# Altium PCB heart.PcbDoc (part 7 of 8)
Units mil, origin at the board's own origin, x right, y up, seen from the top; angles counter-clockwise.
Board outline 5000 x 6000 mil, 2 copper layers (Top Layer, Bottom Layer); 76 components, 43 nets, 328 pads, 50 vias.
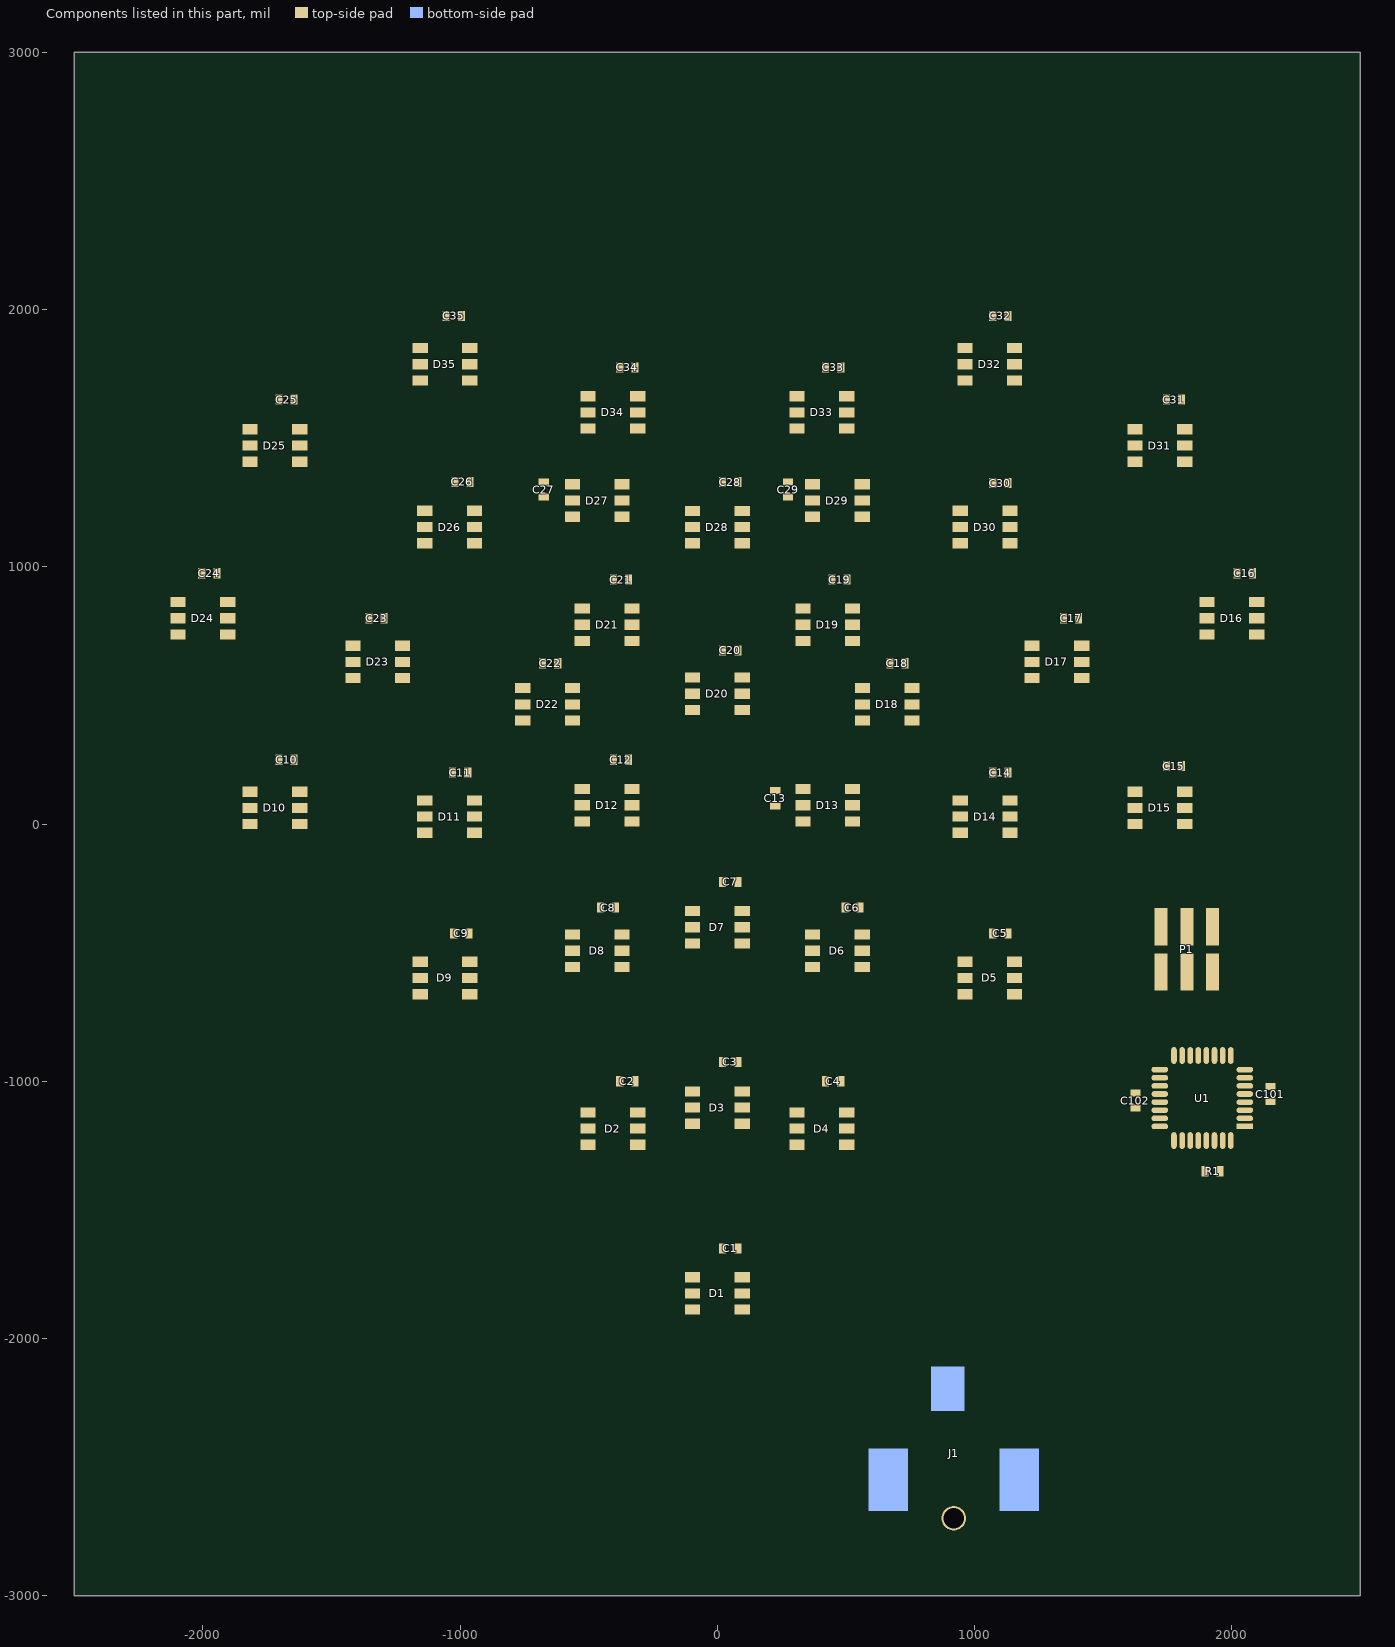
[diagram p7: the components of this part, seen from the top]

## Via types
v1: diameter 48, hole 20, Top Layer to Bottom Layer, 46 vias
v2: diameter 165, hole 150, Top Layer to Bottom Layer, 4 vias

## Nets (pads, with @x,y where several pads share a name; then routed paths per layer and width w, separated by ;. In a path a pad name is that pad's centre, name@x,y a point inside that pad or via, vN(x,y) a via of type N, cw(c..) or ccw(c..) an arc to the next point about the centre after c; other vN are vias at no path point) (continued)
copper on no net: (continued)
  Bottom Layer w2.65: -790.97,-2197.42 -777.7,-2197.42 ; -790.97,-1987.67 -785.66,-1987.67 ; -790.97,-1985.02 -775.04,-1985.02 ; -790.97,-1982.36 -764.42,-1982.36 ; -790.97,-1979.71 -745.84,-1979.71 ; -790.97,-1573.49 -753.8,-1573.49 ; -790.97,-1517.73 -753.8,-1517.73 ; -790.97,-1432.77 -756.46,-1432.77 ; -790.97,-1326.57 -764.42,-1326.57 ; -788.32,-2231.94 -772.39,-2231.94 ; -788.32,-2229.28 -772.39,-2229.28 ; -788.32,-2226.63 -775.04,-2226.63 ; -788.32,-2223.97 -775.04,-2223.97 ; -788.32,-2194.77 -775.04,-2194.77 ; -788.32,-2192.11 -775.04,-2192.11 ; -788.32,-2189.46 -775.04,-2189.46 ; -788.32,-2186.8 -772.39,-2186.8 ; -788.32,-1515.08 -745.84,-1515.08 ; -788.32,-1430.12 -756.46,-1430.12 ; -788.32,-1323.92 -759.11,-1323.92 ; -785.66,-2237.25 -769.73,-2237.25 ; -785.66,-2234.59 -769.73,-2234.59 ; -785.66,-2184.15 -772.39,-2184.15 ; -785.66,-2181.49 -769.73,-2181.49 ; -785.66,-1576.14 -751.15,-1576.14 ; -785.66,-1512.42 -679.46,-1512.42 ; -785.66,-1427.46 -756.46,-1427.46 ; -783.01,-2239.9 -767.08,-2239.9 ; -783.01,-2178.84 -769.73,-2178.84 ; -783.01,-2176.18 -767.08,-2176.18 ; -783.01,-1424.81 -756.46,-1424.81 ; -783.01,-1321.26 -753.8,-1321.26 ; -780.35,-2277.07 -775.04,-2277.07 ; -780.35,-2245.21 -761.77,-2245.21 ; -780.35,-2242.56 -764.42,-2242.56 ; -780.35,-2173.53 -764.42,-2173.53 ; -780.35,-2170.87 -761.77,-2170.87 ; -780.35,-2040.77 -753.8,-2040.77 ; -780.35,-2038.12 -756.46,-2038.12 ; -780.35,-2035.46 -759.11,-2035.46 ; -780.35,-2032.81 -759.11,-2032.81 ; -780.35,-2030.15 -759.11,-2030.15 ; -780.35,-2027.5 -759.11,-2027.5 ; -780.35,-2024.84 -759.11,-2024.84 ; -780.35,-2022.19 -759.11,-2022.19 ; -780.35,-1578.8 -759.11,-1578.8 ; -780.35,-1509.77 -676.81,-1509.77 ; -780.35,-1422.15 -756.46,-1422.15 ; -777.7,-2274.42 -769.73,-2274.42 ; -777.7,-2271.76 -767.08,-2271.76 ; -777.7,-2269.11 -764.42,-2269.11 ; -777.7,-2247.87 -759.11,-2247.87 ; -777.7,-2168.22 -759.11,-2168.22 ; -777.7,-2046.08 -751.15,-2046.08 ; -777.7,-2043.43 -753.8,-2043.43 ; -777.7,-2019.53 -759.11,-2019.53 ; -777.7,-2016.88 -759.11,-2016.88 ; -777.7,-1507.11 -674.15,-1507.11 ; -777.7,-1318.61 -748.49,-1318.61 ; -775.04,-2287.69 -307.76,-2287.69 ; -775.04,-2266.45 -764.42,-2266.45 ; -775.04,-2263.8 -703.36,-2263.8 ; -775.04,-2261.14 -729.91,-2261.14 ; -775.04,-2258.49 -743.18,-2258.49 ; -775.04,-2253.18 -753.8,-2253.18 ; -775.04,-2250.52 -756.46,-2250.52 ; -775.04,-2165.56 -756.46,-2165.56 ; -775.04,-2048.74 -745.84,-2048.74 ; -775.04,-2014.22 -759.11,-2014.22 ; -775.04,-1902.71 -716.63,-1902.71 ; -775.04,-1788.55 -557.33,-1788.55 ; -775.04,-1504.46 -719.29,-1504.46 ; -775.04,-1419.5 -756.46,-1419.5 ; -772.39,-2255.83 -748.49,-2255.83 ; -772.39,-2162.91 -753.8,-2162.91 ; -772.39,-2051.39 -743.18,-2051.39 ; -772.39,-1501.8 -729.91,-1501.8 ; -772.39,-1315.95 -743.18,-1315.95 ; -769.73,-2285.04 -307.76,-2285.04 ; -769.73,-2160.25 -751.15,-2160.25 ; -769.73,-2157.6 -745.84,-2157.6 ; -769.73,-2054.05 -735.22,-2054.05 ; -769.73,-2011.57 -759.11,-2011.57 ; -767.08,-2282.38 -307.76,-2282.38 ; -767.08,-1499.15 -735.22,-1499.15 ; -767.08,-1313.3 -737.87,-1313.3 ; -764.42,-2154.94 -737.87,-2154.94 ; -764.42,-2056.7 -737.87,-2056.7 ; -764.42,-2008.91 -756.46,-2008.91 ; -764.42,-1496.49 -740.53,-1496.49 ; -761.77,-2279.73 -740.53,-2279.73 ; -761.77,-2231.94 -626.36,-2231.94 ; -761.77,-2152.28 -713.98,-2152.28 ; -761.77,-1493.84 -743.18,-1493.84 ; -761.77,-1310.64 -729.91,-1310.64 ; -759.11,-2277.07 -751.15,-2277.07 ; -759.11,-2234.59 -525.47,-2234.59 ; -759.11,-1791.2 -554.67,-1791.2 ; -759.11,-1491.18 -745.84,-1491.18 ; -759.11,-1297.37 -740.53,-1297.37 ; -759.11,-1294.71 -743.18,-1294.71 ; -759.11,-1292.06 -745.84,-1292.06 ; -759.11,-1289.4 -748.49,-1289.4 ; -759.11,-1286.75 -748.49,-1286.75 ; -759.11,-1284.09 -751.15,-1284.09 ; -759.11,-1281.44 -751.15,-1281.44 ; -759.11,-1278.78 -753.8,-1278.78 ; -756.46,-2237.25 -522.81,-2237.25 ; -756.46,-2149.63 -668.84,-2149.63 ; -756.46,-2059.36 -745.84,-2059.36 ; -756.46,-1730.14 -745.84,-1730.14 ; -756.46,-1727.48 -745.84,-1727.48 ; -756.46,-1724.83 -745.84,-1724.83 ; -756.46,-1722.17 -745.84,-1722.17 ; -756.46,-1719.52 -745.84,-1719.52 ; -756.46,-1716.86 -743.18,-1716.86 ; -756.46,-1714.21 -743.18,-1714.21 ; -756.46,-1711.55 -743.18,-1711.55 ; -756.46,-1488.53 -748.49,-1488.53 ; -756.46,-1307.99 -719.29,-1307.99 ; -756.46,-1305.33 -666.19,-1305.33 ; -756.46,-1302.68 -671.5,-1302.68 ; -756.46,-1300.02 -676.81,-1300.02 ; -756.46,-1276.13 -753.8,-1276.13 ; -756.46,-1273.47 -753.8,-1273.47 ; -753.8,-2266.45 -708.67,-2266.45 ; -753.8,-2239.9 -520.16,-2239.9 ; -753.8,-2146.97 -671.5,-2146.97 ; -753.8,-1735.45 -745.84,-1735.45 ; -753.8,-1732.79 -745.84,-1732.79 ; -753.8,-1708.9 -740.53,-1708.9 ; -753.8,-1706.24 -740.53,-1706.24 ; -753.8,-1703.59 -737.87,-1703.59 ; -753.8,-1589.42 -719.29,-1589.42 ; -753.8,-1485.87 -751.15,-1485.87 ; -753.8,-1270.82 -751.15,-1270.82 ; -751.15,-2242.56 -517.5,-2242.56 ; -751.15,-1740.76 -743.18,-1740.76 ; -751.15,-1738.1 -743.18,-1738.1 ; -751.15,-1700.93 -735.22,-1700.93 ; -751.15,-1698.28 -735.22,-1698.28 ; -748.49,-2245.21 -692.74,-2245.21 ; -748.49,-2144.32 -668.84,-2144.32 ; -748.49,-1793.86 -554.67,-1793.86 ; -748.49,-1743.41 -743.18,-1743.41 ; -748.49,-1695.62 -732.56,-1695.62 ; -748.49,-1586.76 -719.29,-1586.76 ; -745.84,-2269.11 -713.98,-2269.11 ; -745.84,-2075.29 -618.4,-2075.29 ; -745.84,-1746.07 -740.53,-1746.07 ; -745.84,-1692.97 -727.25,-1692.97 ; -743.18,-2247.87 -698.05,-2247.87 ; -743.18,-1748.72 -737.87,-1748.72 ; -743.18,-1690.31 -724.6,-1690.31 ; -743.18,-1472.6 -496.26,-1472.6 ; -743.18,-1469.94 -496.26,-1469.94 ; -743.18,-1467.29 -496.26,-1467.29 ; -743.18,-1281.44 -716.63,-1281.44 ; -743.18,-1278.78 -711.32,-1278.78 ; -743.18,-1276.13 -703.36,-1276.13 ; -743.18,-1273.47 -698.05,-1273.47 ; -740.53,-2141.66 -668.84,-2141.66 ; -740.53,-1796.51 -552.02,-1796.51 ; -740.53,-1751.38 -737.87,-1751.38 ; -740.53,-1687.66 -719.29,-1687.66 ; -740.53,-1584.11 -716.63,-1584.11 ; -740.53,-1477.91 -671.5,-1477.91 ; -740.53,-1475.25 -666.19,-1475.25 ; -740.53,-1464.63 -496.26,-1464.63 ; -740.53,-1461.98 -496.26,-1461.98 ; -740.53,-1459.32 -496.26,-1459.32 ; -740.53,-1395.6 -724.6,-1395.6 ; -740.53,-1392.95 -727.25,-1392.95 ; -740.53,-1390.29 -727.25,-1390.29 ; -740.53,-1387.64 -729.91,-1387.64 ; -740.53,-1384.98 -729.91,-1384.98 ; -740.53,-1382.33 -729.91,-1382.33 ; -740.53,-1379.67 -729.91,-1379.67 ; -740.53,-1377.02 -727.25,-1377.02 ; -740.53,-1374.36 -727.25,-1374.36 ; -740.53,-1270.82 -690.08,-1270.82 ; -737.87,-2072.63 -615.74,-2072.63 ; -737.87,-1581.45 -716.63,-1581.45 ; -737.87,-1480.56 -676.81,-1480.56 ; -737.87,-1456.67 -496.26,-1456.67 ; -737.87,-1454.01 -565.3,-1454.01 ; -737.87,-1451.36 -570.61,-1451.36 ; -737.87,-1400.91 -721.94,-1400.91 ; -737.87,-1398.26 -724.6,-1398.26 ; -737.87,-1371.71 -724.6,-1371.71 ; -737.87,-1369.05 -724.6,-1369.05 ; -737.87,-1284.09 -724.6,-1284.09 ; -735.22,-2250.52 -708.67,-2250.52 ; -735.22,-1685 -708.67,-1685 ; -735.22,-1578.8 -713.98,-1578.8 ; -735.22,-1483.22 -682.12,-1483.22 ; -735.22,-1448.7 -573.26,-1448.7 ; -735.22,-1446.05 -575.91,-1446.05 ; -735.22,-1443.39 -578.57,-1443.39 ; -735.22,-1440.74 -581.23,-1440.74 ; -735.22,-1438.08 -581.23,-1438.08 ; -735.22,-1435.43 -583.88,-1435.43 ; -735.22,-1432.77 -583.88,-1432.77 ; -735.22,-1419.5 -732.56,-1419.5 ; -735.22,-1406.22 -711.32,-1406.22 ; -735.22,-1403.57 -716.63,-1403.57 ; -735.22,-1366.4 -719.29,-1366.4 ; -735.22,-1268.16 -682.12,-1268.16 ; -732.56,-2069.98 -613.09,-2069.98 ; -732.56,-1799.17 -549.36,-1799.17 ; -732.56,-1515.08 -682.12,-1515.08 ; -732.56,-1485.87 -687.43,-1485.87 ; -732.56,-1430.12 -708.67,-1430.12 ; -732.56,-1427.46 -719.29,-1427.46 ; -732.56,-1424.81 -724.6,-1424.81 ; -732.56,-1422.15 -729.91,-1422.15 ; -732.56,-1363.74 -716.63,-1363.74 ; -732.56,-1297.37 -682.12,-1297.37 ; -732.56,-1260.2 -660.88,-1260.2 ; -732.56,-1257.54 -655.57,-1257.54 ; -729.91,-2157.6 -713.98,-2157.6 ; -729.91,-2154.94 -713.98,-2154.94 ; -729.91,-2139.01 -698.05,-2139.01 ; -729.91,-1682.35 -602.47,-1682.35 ; -729.91,-1576.14 -711.32,-1576.14 ; -729.91,-1408.88 -660.88,-1408.88 ; -729.91,-1265.51 -676.81,-1265.51 ; -729.91,-1262.85 -668.84,-1262.85 ; -727.25,-2162.91 -713.98,-2162.91 ; -727.25,-2160.25 -713.98,-2160.25 ; -727.25,-2067.32 -607.78,-2067.32 ; -727.25,-1801.82 -546.71,-1801.82 ; -727.25,-1488.53 -690.08,-1488.53 ; -727.25,-1411.53 -666.19,-1411.53 ; -727.25,-1361.09 -695.39,-1361.09 ; -724.6,-2181.49 -721.94,-2181.49 ; -724.6,-2168.22 -716.63,-2168.22 ; -724.6,-2165.56 -713.98,-2165.56 ; -724.6,-2064.67 -605.12,-2064.67 ; -724.6,-1934.57 -639.64,-1934.57 ; -724.6,-1679.69 -610.43,-1679.69 ; -724.6,-1573.49 -711.32,-1573.49 ; -724.6,-1517.73 -682.12,-1517.73 ; -724.6,-1414.19 -668.84,-1414.19 ; -724.6,-1358.43 -700.7,-1358.43 ; -721.94,-2178.84 -719.29,-2178.84 ; -721.94,-2176.18 -719.29,-2176.18 ; -721.94,-2173.53 -716.63,-2173.53 ; -721.94,-2170.87 -716.63,-2170.87 ; -721.94,-2062.01 -597.16,-2062.01 ; -721.94,-1804.48 -544.05,-1804.48 ; -721.94,-1677.04 -613.09,-1677.04 ; -721.94,-1570.83 -708.67,-1570.83 ; -721.94,-1520.39 -682.12,-1520.39 ; -721.94,-1416.84 -674.15,-1416.84 ; -721.94,-1294.71 -684.77,-1294.71 ; -719.29,-2279.73 -307.76,-2279.73 ; -719.29,-2059.36 -586.54,-2059.36 ; -719.29,-1491.18 -698.05,-1491.18 ; -719.29,-1390.29 -674.15,-1390.29 ; -719.29,-1387.64 -671.5,-1387.64 ; -716.63,-2056.7 -496.26,-2056.7 ; -716.63,-2054.05 -496.26,-2054.05 ; -716.63,-1568.18 -706.01,-1568.18 ; -716.63,-1525.7 -682.12,-1525.7 ; -716.63,-1523.04 -682.12,-1523.04 ; -716.63,-1392.95 -676.81,-1392.95 ; -716.63,-1355.78 -708.67,-1355.78 ; -716.63,-1292.06 -684.77,-1292.06 ; -713.98,-2261.14 -698.05,-2261.14 ; -713.98,-2051.39 -496.26,-2051.39 ; -713.98,-1807.13 -538.74,-1807.13 ; -713.98,-1674.38 -618.4,-1674.38 ; -713.98,-1565.52 -700.7,-1565.52 ; -713.98,-1562.87 -698.05,-1562.87 ; -713.98,-1528.35 -679.46,-1528.35 ; -713.98,-1419.5 -682.12,-1419.5 ; -713.98,-1395.6 -682.12,-1395.6 ; -711.32,-2048.74 -496.26,-2048.74 ; -711.32,-1560.21 -692.74,-1560.21 ; -711.32,-1557.56 -684.77,-1557.56 ; -711.32,-1533.66 -676.81,-1533.66 ; -711.32,-1531.01 -679.46,-1531.01 ; -711.32,-1289.4 -676.81,-1289.4 ; -708.67,-2277.07 -517.5,-2277.07 ; -708.67,-2046.08 -496.26,-2046.08 ; -708.67,-1809.79 -536.09,-1809.79 ; -708.67,-1775.27 -562.64,-1775.27 ; -708.67,-1554.9 -639.64,-1554.9 ; -708.67,-1552.25 -639.64,-1552.25 ; -708.67,-1549.59 -636.98,-1549.59 ; -708.67,-1546.94 -636.98,-1546.94 ; -708.67,-1544.28 -634.33,-1544.28 ; -708.67,-1541.63 -634.33,-1541.63 ; -708.67,-1538.97 -668.84,-1538.97 ; -708.67,-1536.32 -674.15,-1536.32 ; -706.01,-2043.43 -496.26,-2043.43 ; -706.01,-2003.6 -695.39,-2003.6 ; -706.01,-1979.71 -586.54,-1979.71 ; -706.01,-1671.73 -621.05,-1671.73 ; -706.01,-1504.46 -671.5,-1504.46 ; -706.01,-1398.26 -690.08,-1398.26 ; -706.01,-1286.75 -668.84,-1286.75 ; -703.36,-2274.42 -520.16,-2274.42 ; -703.36,-2040.77 -496.26,-2040.77 ; -703.36,-2006.26 -671.5,-2006.26 ; -703.36,-1931.92 -639.64,-1931.92 ; -703.36,-1812.44 -528.12,-1812.44 ; -703.36,-1626.59 -682.12,-1626.59 ; -703.36,-1623.93 -687.43,-1623.93 ; -703.36,-1621.28 -690.08,-1621.28 ; -703.36,-1618.62 -692.74,-1618.62 ; -703.36,-1615.97 -695.39,-1615.97 ; -703.36,-1613.31 -695.39,-1613.31 ; -703.36,-1610.66 -698.05,-1610.66 ; -703.36,-1608 -698.05,-1608 ; -703.36,-1605.35 -698.05,-1605.35 ; -703.36,-1602.69 -698.05,-1602.69 ; -700.7,-2258.49 -695.39,-2258.49 ; -700.7,-2152.28 -663.53,-2152.28 ; -700.7,-2038.12 -496.26,-2038.12 ; -700.7,-2035.46 -496.26,-2035.46 ; -700.7,-2032.81 -496.26,-2032.81 ; -700.7,-2014.22 -496.26,-2014.22 ; -700.7,-2011.57 -496.26,-2011.57 ; -700.7,-2008.91 -496.26,-2008.91 ; -700.7,-1815.1 -496.26,-1815.1 ; -700.7,-1772.62 -565.3,-1772.62 ; -700.7,-1669.07 -621.05,-1669.07 ; -700.7,-1637.21 -690.08,-1637.21 ; -700.7,-1634.55 -684.77,-1634.55 ; -700.7,-1631.9 -679.46,-1631.9 ; -700.7,-1629.24 -674.15,-1629.24 ; -700.7,-1600.04 -698.05,-1600.04 ; -700.7,-1597.38 -695.39,-1597.38 ; -700.7,-1594.73 -695.39,-1594.73 ; -700.7,-1284.09 -660.88,-1284.09 ; -698.05,-2271.76 -520.16,-2271.76 ; -698.05,-2030.15 -496.26,-2030.15 ; -698.05,-2027.5 -496.26,-2027.5 ; -698.05,-2024.84 -496.26,-2024.84 ; -698.05,-2022.19 -496.26,-2022.19 ; -698.05,-2019.53 -496.26,-2019.53 ; -698.05,-2016.88 -496.26,-2016.88 ; -698.05,-1685 -509.54,-1685 ; -698.05,-1592.07 -692.74,-1592.07 ; -698.05,-1589.42 -690.08,-1589.42 ; -695.39,-1817.75 -496.26,-1817.75 ; -695.39,-1769.96 -565.3,-1769.96 ; -695.39,-1586.76 -684.77,-1586.76 ; -695.39,-1584.11 -658.22,-1584.11 ; -692.74,-2269.11 -520.16,-2269.11 ; -692.74,-1929.26 -639.64,-1929.26 ; -692.74,-1666.42 -623.71,-1666.42 ; -692.74,-1581.45 -660.88,-1581.45 ; -692.74,-1501.8 -636.98,-1501.8 ; -692.74,-1307.99 -663.53,-1307.99 ; -692.74,-1281.44 -655.57,-1281.44 ; -690.08,-2266.45 -514.85,-2266.45 ; -690.08,-2154.94 -658.22,-2154.94 ; -690.08,-1820.41 -496.26,-1820.41 ; -690.08,-1767.31 -565.3,-1767.31 ; -690.08,-1578.8 -663.53,-1578.8 ; -687.43,-2263.8 -506.88,-2263.8 ; -687.43,-1823.06 -496.26,-1823.06 ; -687.43,-1687.66 -517.5,-1687.66 ; -687.43,-1499.15 -639.64,-1499.15 ; -687.43,-1430.12 -583.88,-1430.12 ; -684.77,-2261.14 -504.23,-2261.14 ; -684.77,-2139.01 -668.84,-2139.01 ; -684.77,-1926.61 -639.64,-1926.61 ; -684.77,-1764.65 -565.3,-1764.65 ; -684.77,-1663.76 -626.36,-1663.76 ; -684.77,-1576.14 -666.19,-1576.14 ; -684.77,-1406.22 -658.22,-1406.22 ; -684.77,-1310.64 -660.88,-1310.64 ; -684.77,-1278.78 -647.6,-1278.78 ; -682.12,-2258.49 -504.23,-2258.49 ; -682.12,-2255.83 -506.88,-2255.83 ; -682.12,-2157.6 -652.91,-2157.6 ; -682.12,-2107.15 -629.02,-2107.15 ; -682.12,-1982.36 -591.85,-1982.36 ; -682.12,-1825.72 -496.26,-1825.72 ; -682.12,-1762 -565.3,-1762 ; -682.12,-1690.31 -525.47,-1690.31 ; -682.12,-1496.49 -639.64,-1496.49 ; -679.46,-2253.18 -506.88,-2253.18 ; -679.46,-2250.52 -509.54,-2250.52 ; -679.46,-2247.87 -512.19,-2247.87 ; -679.46,-2245.21 -514.85,-2245.21 ; -679.46,-2136.35 -666.19,-2136.35 ; -679.46,-1923.95 -636.98,-1923.95 ; -679.46,-1828.37 -496.26,-1828.37 ; -679.46,-1692.97 -530.78,-1692.97 ; -679.46,-1661.11 -629.02,-1661.11 ; -679.46,-1493.84 -639.64,-1493.84 ; -679.46,-1403.57 -655.57,-1403.57 ; -679.46,-1313.3 -658.22,-1313.3 ; -679.46,-1276.13 -639.64,-1276.13 ; -676.81,-2160.25 -647.6,-2160.25 ; -676.81,-2133.7 -666.19,-2133.7 ; -676.81,-1759.34 -565.3,-1759.34 ; -676.81,-1427.46 -583.88,-1427.46 ; -674.15,-2131.04 -666.19,-2131.04 ; -674.15,-1921.3 -636.98,-1921.3 ; -674.15,-1831.03 -496.26,-1831.03 ; -674.15,-1756.69 -567.95,-1756.69 ; -674.15,-1695.62 -581.23,-1695.62 ; -674.15,-1658.45 -629.02,-1658.45 ; -674.15,-1491.18 -642.29,-1491.18 ; -674.15,-1400.91 -652.91,-1400.91 ; -674.15,-1315.95 -655.57,-1315.95 ; -671.5,-2162.91 -642.29,-2162.91 ; -671.5,-2128.39 -666.19,-2128.39 ; -671.5,-2125.73 -668.84,-2125.73 ; -671.5,-2123.08 -668.84,-2123.08 ; -671.5,-2109.8 -629.02,-2109.8 ; -671.5,-1833.68 -496.26,-1833.68 ; -671.5,-1754.03 -567.95,-1754.03 ; -671.5,-1700.93 -583.88,-1700.93 ; -671.5,-1698.28 -581.23,-1698.28 ; -671.5,-1557.56 -642.29,-1557.56 ; -671.5,-1488.53 -644.95,-1488.53 ; -671.5,-1424.81 -583.88,-1424.81 ; -671.5,-1318.61 -652.91,-1318.61 ; -671.5,-1273.47 -631.67,-1273.47 ; -668.84,-1918.64 -636.98,-1918.64 ; -668.84,-1836.34 -496.26,-1836.34 ; -668.84,-1751.38 -565.3,-1751.38 ; -668.84,-1748.72 -565.3,-1748.72 ; -668.84,-1703.59 -583.88,-1703.59 ; -668.84,-1655.8 -631.67,-1655.8 ; -668.84,-1586.76 -655.57,-1586.76 ; -668.84,-1398.26 -650.26,-1398.26 ; -668.84,-1321.26 -650.26,-1321.26 ; -666.19,-2165.56 -636.98,-2165.56 ; -666.19,-2112.46 -629.02,-2112.46 ; -666.19,-1985.02 -599.81,-1985.02 ; -666.19,-1915.99 -634.33,-1915.99 ; -666.19,-1838.99 -496.26,-1838.99 ; -666.19,-1746.07 -565.3,-1746.07 ; -666.19,-1708.9 -583.88,-1708.9 ; -666.19,-1706.24 -583.88,-1706.24 ; -666.19,-1589.42 -655.57,-1589.42 ; -666.19,-1485.87 -647.6,-1485.87 ; -666.19,-1422.15 -583.88,-1422.15 ; -666.19,-1395.6 -623.71,-1395.6 ; -666.19,-1323.92 -647.6,-1323.92 ; -663.53,-2115.11 -626.36,-2115.11 ; -663.53,-1913.33 -631.67,-1913.33 ; -663.53,-1841.65 -496.26,-1841.65 ; -663.53,-1743.41 -565.3,-1743.41 ; -663.53,-1740.76 -570.61,-1740.76 ; -663.53,-1738.1 -575.91,-1738.1 ; -663.53,-1716.86 -586.54,-1716.86 ; -663.53,-1714.21 -586.54,-1714.21 ; -663.53,-1711.55 -586.54,-1711.55 ; -663.53,-1653.14 -634.33,-1653.14 ; -663.53,-1560.21 -642.29,-1560.21 ; -663.53,-1392.95 -618.4,-1392.95 ; -663.53,-1326.57 -647.6,-1326.57 ; -663.53,-1270.82 -623.71,-1270.82 ; -660.88,-2168.22 -634.33,-2168.22 ; -660.88,-2120.42 -626.36,-2120.42 ; -660.88,-2117.77 -626.36,-2117.77 ; -660.88,-1910.68 -631.67,-1910.68 ; -660.88,-1844.3 -496.26,-1844.3 ; -660.88,-1735.45 -578.57,-1735.45 ; -660.88,-1732.79 -581.23,-1732.79 ; -660.88,-1730.14 -583.88,-1730.14 ; -660.88,-1727.48 -583.88,-1727.48 ; -660.88,-1724.83 -586.54,-1724.83 ; -660.88,-1722.17 -586.54,-1722.17 ; -660.88,-1719.52 -586.54,-1719.52 ; -660.88,-1594.73 -655.57,-1594.73 ; -660.88,-1592.07 -655.57,-1592.07 ; -660.88,-1419.5 -583.88,-1419.5 ; -660.88,-1390.29 -615.74,-1390.29 ; -660.88,-1329.23 -644.95,-1329.23 ; -658.22,-2125.73 -623.71,-2125.73 ; -658.22,-2123.08 -623.71,-2123.08 ; -658.22,-1908.02 -629.02,-1908.02 ; -658.22,-1849.61 -496.26,-1849.61 ; -658.22,-1846.96 -496.26,-1846.96 ; -658.22,-1650.49 -634.33,-1650.49 ; -658.22,-1600.04 -655.57,-1600.04 ; -658.22,-1597.38 -655.57,-1597.38 ; -658.22,-1562.87 -642.29,-1562.87 ; -658.22,-1538.97 -631.67,-1538.97 ; -658.22,-1416.84 -583.88,-1416.84 ; -658.22,-1387.64 -615.74,-1387.64 ; -658.22,-1384.98 -631.67,-1384.98 ; -658.22,-1334.54 -642.29,-1334.54 ; -658.22,-1331.88 -644.95,-1331.88 ; -658.22,-1268.16 -615.74,-1268.16 ; -655.57,-2170.87 -629.02,-2170.87 ; -655.57,-1905.37 -626.36,-1905.37 ; -655.57,-1902.71 -623.71,-1902.71 ; -655.57,-1852.27 -496.26,-1852.27 ; -655.57,-1565.52 -644.95,-1565.52 ; -655.57,-1504.46 -636.98,-1504.46 ; -655.57,-1382.33 -636.98,-1382.33 ; -655.57,-1379.67 -639.64,-1379.67 ; -655.57,-1339.85 -642.29,-1339.85 ; -655.57,-1337.19 -642.29,-1337.19 ; -652.91,-1900.06 -618.4,-1900.06 ; -652.91,-1897.4 -615.74,-1897.4 ; -652.91,-1857.58 -496.26,-1857.58 ; -652.91,-1854.92 -496.26,-1854.92 ; -652.91,-1647.83 -636.98,-1647.83 ; -652.91,-1536.32 -631.67,-1536.32 ; -652.91,-1507.11 -639.64,-1507.11 ; -652.91,-1414.19 -581.23,-1414.19 ; -652.91,-1377.02 -639.64,-1377.02 ; -652.91,-1374.36 -639.64,-1374.36 ; -652.91,-1371.71 -639.64,-1371.71 ; -652.91,-1369.05 -636.98,-1369.05 ; -652.91,-1350.47 -639.64,-1350.47 ; -652.91,-1347.81 -639.64,-1347.81 ; -652.91,-1345.16 -639.64,-1345.16 ; -652.91,-1342.5 -639.64,-1342.5 ; -650.26,-2173.53 -621.05,-2173.53 ; -650.26,-1894.75 -607.78,-1894.75 ; -650.26,-1892.09 -599.81,-1892.09 ; -650.26,-1889.44 -496.26,-1889.44 ; -650.26,-1886.78 -496.26,-1886.78 ; -650.26,-1868.2 -496.26,-1868.2 ; -650.26,-1865.54 -496.26,-1865.54 ; -650.26,-1862.89 -496.26,-1862.89 ; -650.26,-1860.23 -496.26,-1860.23 ; -650.26,-1645.18 -636.98,-1645.18 ; -650.26,-1570.83 -644.95,-1570.83 ; -650.26,-1568.18 -644.95,-1568.18 ; -650.26,-1533.66 -629.02,-1533.66 ; -650.26,-1509.77 -639.64,-1509.77 ; -650.26,-1475.25 -496.26,-1475.25 ; -650.26,-1411.53 -581.23,-1411.53 ; -650.26,-1366.4 -636.98,-1366.4 ; -650.26,-1363.74 -636.98,-1363.74 ; -650.26,-1361.09 -636.98,-1361.09 ; -650.26,-1358.43 -636.98,-1358.43 ; -650.26,-1355.78 -636.98,-1355.78 ; -650.26,-1353.12 -636.98,-1353.12 ; -650.26,-1265.51 -607.78,-1265.51 ; -647.6,-2176.18 -615.74,-2176.18 ; -647.6,-1884.13 -496.26,-1884.13 ; -647.6,-1881.47 -496.26,-1881.47 ; -647.6,-1878.82 -496.26,-1878.82 ; -647.6,-1876.16 -496.26,-1876.16 ; -647.6,-1873.51 -496.26,-1873.51 ; -647.6,-1870.85 -496.26,-1870.85 ; -647.6,-1642.52 -639.64,-1642.52 ; -647.6,-1573.49 -644.95,-1573.49 ; -647.6,-1531.01 -626.36,-1531.01 ; -647.6,-1515.08 -642.29,-1515.08 ; -647.6,-1512.42 -639.64,-1512.42 ; -647.6,-1408.88 -578.57,-1408.88 ; -644.95,-1987.67 -613.09,-1987.67 ; -644.95,-1517.73 -642.29,-1517.73 ; -644.95,-1477.91 -496.26,-1477.91 ; -642.29,-2178.84 -607.78,-2178.84 ; -642.29,-1639.86 -639.64,-1639.86 ; -642.29,-1528.35 -626.36,-1528.35 ; -642.29,-1262.85 -597.16,-1262.85 ; -639.64,-2202.73 -629.02,-2202.73 ; -639.64,-2200.08 -626.36,-2200.08 ; -639.64,-1525.7 -623.71,-1525.7 ; -639.64,-1480.56 -541.4,-1480.56 ; -639.64,-1398.26 -631.67,-1398.26 ; -639.64,-1260.2 -586.54,-1260.2 ; -636.98,-2213.35 -631.67,-2213.35 ; -636.98,-2210.7 -631.67,-2210.7 ; -636.98,-2208.04 -631.67,-2208.04 ; -636.98,-2205.39 -629.02,-2205.39 ; -636.98,-2197.42 -623.71,-2197.42 ; -636.98,-2194.77 -621.05,-2194.77 ; -636.98,-2192.11 -618.4,-2192.11 ; -636.98,-2189.46 -554.67,-2189.46 ; -636.98,-2186.8 -549.36,-2186.8 ; -636.98,-2181.49 -599.81,-2181.49 ; -636.98,-1523.04 -621.05,-1523.04 ; -636.98,-1520.39 -618.4,-1520.39 ; -636.98,-1483.22 -557.33,-1483.22 ; -634.33,-2216.01 -631.67,-2216.01 ; -634.33,-2184.15 -546.71,-2184.15 ; -634.33,-1517.73 -615.74,-1517.73 ; -634.33,-1515.08 -613.09,-1515.08 ; -634.33,-1488.53 -573.26,-1488.53 ; -634.33,-1485.87 -565.3,-1485.87 ; -634.33,-1257.54 -533.43,-1257.54 ; -631.67,-1512.42 -610.43,-1512.42 ; -631.67,-1509.77 -607.78,-1509.77 ; -631.67,-1507.11 -605.12,-1507.11 ; -631.67,-1504.46 -602.47,-1504.46 ; -631.67,-1501.8 -597.16,-1501.8 ; -631.67,-1499.15 -594.5,-1499.15 ; -631.67,-1496.49 -589.19,-1496.49 ; -631.67,-1493.84 -583.88,-1493.84 ; -631.67,-1491.18 -578.57,-1491.18 ; -631.67,-1284.09 -538.74,-1284.09 ; -631.67,-1254.89 -623.71,-1254.89 ; -629.02,-1252.23 -621.05,-1252.23 ; -629.02,-1212.41 -307.76,-1212.41 ; -626.36,-1623.93 -597.16,-1623.93 ; -626.36,-1281.44 -541.4,-1281.44 ; -626.36,-1249.58 -621.05,-1249.58 ; -626.36,-1246.92 -621.05,-1246.92 ; -623.71,-1637.21 -618.4,-1637.21 ; -623.71,-1634.55 -615.74,-1634.55 ; -623.71,-1631.9 -613.09,-1631.9 ; -623.71,-1629.24 -610.43,-1629.24 ; -623.71,-1626.59 -607.78,-1626.59 ; -623.71,-1621.28 -591.85,-1621.28 ; -623.71,-1406.22 -573.26,-1406.22 ; -623.71,-1244.27 -618.4,-1244.27 ; -621.05,-2107.15 -607.78,-2107.15 ; -621.05,-2104.49 -607.78,-2104.49 ; -621.05,-2101.84 -607.78,-2101.84 ; -621.05,-2099.18 -607.78,-2099.18 ; -621.05,-1639.86 -618.4,-1639.86 ; -621.05,-1618.62 -591.85,-1618.62 ; -621.05,-1384.98 -613.09,-1384.98 ; -621.05,-1241.61 -618.4,-1241.61 ; -621.05,-1238.96 -618.4,-1238.96 ; -618.4,-2115.11 -605.12,-2115.11 ; -618.4,-2112.46 -607.78,-2112.46 ; -618.4,-2109.8 -607.78,-2109.8 ; -618.4,-2096.53 -605.12,-2096.53 ; -618.4,-2093.87 -605.12,-2093.87 ; -618.4,-2091.22 -602.47,-2091.22 ; -618.4,-1615.97 -591.85,-1615.97 ; -618.4,-1613.31 -591.85,-1613.31 ; -618.4,-1403.57 -541.4,-1403.57 ; -618.4,-1382.33 -613.09,-1382.33 ; -618.4,-1278.78 -541.4,-1278.78 ; -618.4,-1254.89 -536.09,-1254.89 ; -618.4,-1215.06 -307.76,-1215.06 ; -615.74,-2120.42 -602.47,-2120.42 ; -615.74,-2117.77 -605.12,-2117.77 ; -615.74,-2088.56 -599.81,-2088.56 ; -615.74,-2085.91 -597.16,-2085.91 ; -615.74,-1610.66 -591.85,-1610.66 ; -615.74,-1400.91 -541.4,-1400.91 ; -615.74,-1379.67 -613.09,-1379.67 ; -615.74,-1217.72 -416.61,-1217.72 ; -613.09,-2123.08 -599.81,-2123.08 ; -613.09,-2083.25 -591.85,-2083.25 ; -613.09,-1608 -591.85,-1608 ; -613.09,-1398.26 -538.74,-1398.26 ; -613.09,-1276.13 -544.05,-1276.13 ; -613.09,-1220.37 -424.58,-1220.37 ; -610.43,-2231.94 -533.43,-2231.94 ; -610.43,-2192.11 -559.98,-2192.11 ; -610.43,-2125.73 -594.5,-2125.73 ; -610.43,-2080.6 -541.4,-2080.6 ; -610.43,-2006.26 -496.26,-2006.26 ; -610.43,-1605.35 -591.85,-1605.35 ; -610.43,-1602.69 -589.19,-1602.69 ; -610.43,-1395.6 -538.74,-1395.6 ; -610.43,-1252.23 -541.4,-1252.23 ; -610.43,-1225.68 -429.89,-1225.68 ; -610.43,-1223.03 -427.23,-1223.03 ; -607.78,-2128.39 -575.91,-2128.39 ; -607.78,-2077.94 -544.05,-2077.94 ; -607.78,-1600.04 -589.19,-1600.04 ; -607.78,-1392.95 -538.74,-1392.95 ; -607.78,-1390.29 -538.74,-1390.29 ; -607.78,-1241.61 -605.12,-1241.61 ; -607.78,-1238.96 -594.5,-1238.96 ; -607.78,-1236.3 -435.2,-1236.3 ; -607.78,-1233.65 -435.2,-1233.65 ; -607.78,-1230.99 -435.2,-1230.99 ; -607.78,-1228.34 -435.2,-1228.34 ; -605.12,-2075.29 -549.36,-2075.29 ; -605.12,-1597.38 -586.54,-1597.38 ; -605.12,-1594.73 -583.88,-1594.73 ; -605.12,-1387.64 -538.74,-1387.64 ; -602.47,-2194.77 -565.3,-2194.77 ; -602.47,-2131.04 -578.57,-2131.04 ; -602.47,-1966.43 -570.61,-1966.43 ; -602.47,-1592.07 -581.23,-1592.07 ; -602.47,-1589.42 -575.91,-1589.42 ; -602.47,-1273.47 -549.36,-1273.47 ; -599.81,-2109.8 -544.05,-2109.8 ; -599.81,-2107.15 -546.71,-2107.15 ; -599.81,-2104.49 -546.71,-2104.49 ; -599.81,-2101.84 -549.36,-2101.84 ; -599.81,-2072.63 -554.67,-2072.63 ; -599.81,-2003.6 -496.26,-2003.6 ; -599.81,-1586.76 -570.61,-1586.76 ; -599.81,-1584.11 -570.61,-1584.11 ; -599.81,-1249.58 -549.36,-1249.58 ; -597.16,-2197.42 -562.64,-2197.42 ; -597.16,-2112.46 -544.05,-2112.46 ; -597.16,-2099.18 -552.02,-2099.18 ; -597.16,-1581.45 -570.61,-1581.45 ; -597.16,-1578.8 -573.26,-1578.8 ; -597.16,-1576.14 -573.26,-1576.14 ; -597.16,-1315.95 -589.19,-1315.95 ; -597.16,-1313.3 -591.85,-1313.3 ; -597.16,-1310.64 -594.5,-1310.64 ; -594.5,-2133.7 -589.19,-2133.7 ; -594.5,-2115.11 -570.61,-2115.11 ; -594.5,-2096.53 -557.33,-2096.53 ; -594.5,-1573.49 -573.26,-1573.49 ; -594.5,-1570.83 -573.26,-1570.83 ; -594.5,-1321.26 -581.23,-1321.26 ; -594.5,-1318.61 -586.54,-1318.61 ; -591.85,-2093.87 -562.64,-2093.87 ; -591.85,-2069.98 -562.64,-2069.98 ; -591.85,-2000.95 -496.26,-2000.95 ; -591.85,-1963.78 -567.95,-1963.78 ; -591.85,-1568.18 -570.61,-1568.18 ; -591.85,-1565.52 -570.61,-1565.52 ; -591.85,-1562.87 -570.61,-1562.87 ; -591.85,-1560.21 -570.61,-1560.21 ; -591.85,-1326.57 -570.61,-1326.57 ; -591.85,-1323.92 -578.57,-1323.92 ; -591.85,-1270.82 -554.67,-1270.82 ; -589.19,-2200.08 -554.67,-2200.08 ; -589.19,-2117.77 -578.57,-2117.77 ; -589.19,-1682.35 -496.26,-1682.35 ; -589.19,-1557.56 -570.61,-1557.56 ; -589.19,-1554.9 -567.95,-1554.9 ; -589.19,-1552.25 -567.95,-1552.25 ; -589.19,-1549.59 -567.95,-1549.59 ; -589.19,-1329.23 -528.12,-1329.23 ; -586.54,-1998.29 -496.26,-1998.29 ; -586.54,-1961.12 -565.3,-1961.12 ; -586.54,-1546.94 -565.3,-1546.94 ; -586.54,-1544.28 -565.3,-1544.28 ; -586.54,-1541.63 -562.64,-1541.63 ; -586.54,-1538.97 -559.98,-1538.97 ; -586.54,-1536.32 -559.98,-1536.32 ; -586.54,-1533.66 -557.33,-1533.66 ; -586.54,-1531.01 -554.67,-1531.01 ; -586.54,-1528.35 -552.02,-1528.35 ; -586.54,-1331.88 -530.78,-1331.88 ; -586.54,-1246.92 -559.98,-1246.92 ; -583.88,-2202.73 -549.36,-2202.73 ; -583.88,-2091.22 -567.95,-2091.22 ; -583.88,-1958.47 -565.3,-1958.47 ; -583.88,-1905.37 -581.23,-1905.37 ; -583.88,-1892.09 -496.26,-1892.09 ; -583.88,-1525.7 -549.36,-1525.7 ; -581.23,-1995.64 -498.92,-1995.64 ; -581.23,-1955.81 -562.64,-1955.81 ; -581.23,-1908.02 -575.91,-1908.02 ; -581.23,-1679.69 -496.26,-1679.69 ; -581.23,-1626.59 -552.02,-1626.59 ; -581.23,-1623.93 -554.67,-1623.93 ; -581.23,-1605.35 -559.98,-1605.35 ; -581.23,-1523.04 -544.05,-1523.04 ; -581.23,-1334.54 -533.43,-1334.54 ; -578.57,-2205.39 -541.4,-2205.39 ; -578.57,-1953.16 -562.64,-1953.16 ; -578.57,-1913.33 -570.61,-1913.33 ; -578.57,-1910.68 -573.26,-1910.68 ; -578.57,-1698.28 -538.74,-1698.28 ; -578.57,-1695.62 -536.09,-1695.62 ; -578.57,-1677.04 -496.26,-1677.04 ; -578.57,-1621.28 -557.33,-1621.28 ; -578.57,-1618.62 -559.98,-1618.62 ; -578.57,-1602.69 -541.4,-1602.69 ; -578.57,-1520.39 -538.74,-1520.39 ; -575.91,-1992.98 -498.92,-1992.98 ; -575.91,-1950.5 -559.98,-1950.5 ; -575.91,-1947.85 -559.98,-1947.85 ; -575.91,-1915.99 -567.95,-1915.99 ; -575.91,-1894.75 -496.26,-1894.75 ; -575.91,-1724.83 -552.02,-1724.83 ; -575.91,-1706.24 -546.71,-1706.24 ; -575.91,-1703.59 -544.05,-1703.59 ; -575.91,-1700.93 -541.4,-1700.93 ; -575.91,-1674.38 -496.26,-1674.38 ; -575.91,-1629.24 -546.71,-1629.24 ; -575.91,-1615.97 -567.95,-1615.97 ; -575.91,-1600.04 -544.05,-1600.04 ; -575.91,-1337.19 -538.74,-1337.19 ; -573.26,-1945.19 -559.98,-1945.19 ; -573.26,-1942.54 -559.98,-1942.54 ; -573.26,-1939.88 -559.98,-1939.88 ; -573.26,-1923.95 -562.64,-1923.95 ; -573.26,-1921.3 -562.64,-1921.3 ; -573.26,-1918.64 -565.3,-1918.64 ; -573.26,-1727.48 -536.09,-1727.48 ; -573.26,-1711.55 -554.67,-1711.55 ; -573.26,-1708.9 -549.36,-1708.9 ; -573.26,-1671.73 -496.26,-1671.73 ; -573.26,-1634.55 -541.4,-1634.55 ; -573.26,-1631.9 -544.05,-1631.9 ; -573.26,-1517.73 -533.43,-1517.73 ; -573.26,-1268.16 -567.95,-1268.16 ; -570.61,-2208.04 -533.43,-2208.04 ; -570.61,-2181.49 -541.4,-2181.49 ; -570.61,-1990.33 -501.57,-1990.33 ; -570.61,-1937.23 -559.98,-1937.23 ; -570.61,-1934.57 -559.98,-1934.57 ; -570.61,-1931.92 -559.98,-1931.92 ; -570.61,-1929.26 -559.98,-1929.26 ; -570.61,-1926.61 -559.98,-1926.61 ; -570.61,-1897.4 -496.26,-1897.4 ; -570.61,-1730.14 -538.74,-1730.14 ; -570.61,-1714.21 -559.98,-1714.21 ; -570.61,-1669.07 -496.26,-1669.07 ; -570.61,-1666.42 -496.26,-1666.42 ; -570.61,-1637.21 -536.09,-1637.21 ; -570.61,-1597.38 -544.05,-1597.38 ; -570.61,-1339.85 -546.71,-1339.85 ; -567.95,-2059.36 -496.26,-2059.36 ; -567.95,-1987.67 -501.57,-1987.67 ; -567.95,-1732.79 -538.74,-1732.79 ; -567.95,-1663.76 -496.26,-1663.76 ; -567.95,-1661.11 -496.26,-1661.11 ; -567.95,-1658.45 -496.26,-1658.45 ; -567.95,-1655.8 -496.26,-1655.8 ; -567.95,-1653.14 -496.26,-1653.14 ; -567.95,-1647.83 -496.26,-1647.83 ; -567.95,-1645.18 -517.5,-1645.18 ; -567.95,-1642.52 -525.47,-1642.52 ; -567.95,-1639.86 -533.43,-1639.86 ; -567.95,-1515.08 -496.26,-1515.08 ; -565.3,-2210.7 -525.47,-2210.7 ; -565.3,-1985.02 -504.23,-1985.02 ; -565.3,-1900.06 -496.26,-1900.06 ; -565.3,-1650.49 -496.26,-1650.49 ; -565.3,-1594.73 -546.71,-1594.73 ; -565.3,-1438.08 -549.36,-1438.08 ; -562.64,-2178.84 -538.74,-2178.84 ; -562.64,-2083.25 -536.09,-2083.25 ; -562.64,-1982.36 -504.23,-1982.36 ; -562.64,-1902.71 -496.26,-1902.71 ; -562.64,-1735.45 -541.4,-1735.45 ; -562.64,-1608 -559.98,-1608 ; -562.64,-1592.07 -546.71,-1592.07 ; -562.64,-1589.42 -549.36,-1589.42 ; -562.64,-1586.76 -549.36,-1586.76 ; -562.64,-1584.11 -549.36,-1584.11 ; -562.64,-1581.45 -549.36,-1581.45 ; -562.64,-1578.8 -552.02,-1578.8 ; -562.64,-1576.14 -552.02,-1576.14 ; -562.64,-1573.49 -552.02,-1573.49 ; -562.64,-1570.83 -552.02,-1570.83 ; -562.64,-1568.18 -552.02,-1568.18 ; -562.64,-1565.52 -552.02,-1565.52 ; -562.64,-1562.87 -552.02,-1562.87 ; -562.64,-1440.74 -552.02,-1440.74 ; -562.64,-1406.22 -541.4,-1406.22 ; -559.98,-2125.73 -538.74,-2125.73 ; -559.98,-2123.08 -538.74,-2123.08 ; -559.98,-2120.42 -538.74,-2120.42 ; -559.98,-2117.77 -541.4,-2117.77 ; -559.98,-2115.11 -541.4,-2115.11 ; -559.98,-1979.71 -504.23,-1979.71 ; -559.98,-1905.37 -496.26,-1905.37 ; -559.98,-1560.21 -552.02,-1560.21 ; -559.98,-1557.56 -549.36,-1557.56 ; -559.98,-1554.9 -549.36,-1554.9 ; -559.98,-1512.42 -496.26,-1512.42 ; -559.98,-1435.43 -546.71,-1435.43 ; -559.98,-1260.2 -530.78,-1260.2 ; -557.33,-2213.35 -517.5,-2213.35 ; -557.33,-2176.18 -536.09,-2176.18 ; -557.33,-2085.91 -533.43,-2085.91 ; -557.33,-2062.01 -496.26,-2062.01 ; -557.33,-1977.05 -506.88,-1977.05 ; -557.33,-1974.4 -506.88,-1974.4 ; -557.33,-1908.02 -496.26,-1908.02 ; -557.33,-1767.31 -546.71,-1767.31 ; -557.33,-1764.65 -546.71,-1764.65 ; -557.33,-1762 -546.71,-1762 ; -557.33,-1759.34 -546.71,-1759.34 ; -557.33,-1756.69 -546.71,-1756.69 ; -557.33,-1754.03 -546.71,-1754.03 ; -557.33,-1751.38 -546.71,-1751.38 ; -557.33,-1748.72 -544.05,-1748.72 ; -557.33,-1746.07 -544.05,-1746.07 ; -557.33,-1743.41 -544.05,-1743.41 ; -557.33,-1740.76 -544.05,-1740.76 ; -557.33,-1738.1 -541.4,-1738.1 ; -557.33,-1722.17 -554.67,-1722.17 ; -557.33,-1605.35 -541.4,-1605.35 ; -557.33,-1552.25 -549.36,-1552.25 ; -557.33,-1549.59 -546.71,-1549.59 ; -557.33,-1408.88 -541.4,-1408.88 ; -554.67,-1971.74 -501.57,-1971.74 ; -554.67,-1910.68 -496.26,-1910.68 ; -554.67,-1775.27 -544.05,-1775.27 ; -554.67,-1772.62 -544.05,-1772.62 ; -554.67,-1769.96 -544.05,-1769.96 ; -554.67,-1608 -538.74,-1608 ; -554.67,-1546.94 -546.71,-1546.94 ; -554.67,-1544.28 -544.05,-1544.28 ; -554.67,-1432.77 -544.05,-1432.77 ; -554.67,-1430.12 -544.05,-1430.12 ; -554.67,-1414.19 -541.4,-1414.19 ; -554.67,-1411.53 -541.4,-1411.53 ; -552.02,-2173.53 -533.43,-2173.53 ; -552.02,-2088.56 -530.78,-2088.56 ; -552.02,-1969.09 -496.26,-1969.09 ; -552.02,-1966.43 -496.26,-1966.43 ; -552.02,-1915.99 -496.26,-1915.99 ; -552.02,-1913.33 -496.26,-1913.33 ; -552.02,-1780.58 -541.4,-1780.58 ; -552.02,-1777.93 -544.05,-1777.93 ; -552.02,-1613.31 -533.43,-1613.31 ; -552.02,-1610.66 -536.09,-1610.66 ; -552.02,-1541.63 -544.05,-1541.63 ; -552.02,-1509.77 -501.57,-1509.77 ; -552.02,-1427.46 -541.4,-1427.46 ; -552.02,-1424.81 -541.4,-1424.81 ; -552.02,-1422.15 -541.4,-1422.15 ; -552.02,-1419.5 -541.4,-1419.5 ; -552.02,-1416.84 -541.4,-1416.84 ; -552.02,-1238.96 -413.96,-1238.96 ; -549.36,-2216.01 -509.54,-2216.01 ; -549.36,-2170.87 -530.78,-2170.87 ; -549.36,-2091.22 -530.78,-2091.22 ; -549.36,-2064.67 -496.26,-2064.67 ; -549.36,-1963.78 -496.26,-1963.78 ; -549.36,-1961.12 -496.26,-1961.12 ; -549.36,-1921.3 -496.26,-1921.3 ; -549.36,-1918.64 -496.26,-1918.64 ; -549.36,-1785.89 -538.74,-1785.89 ; -549.36,-1783.24 -541.4,-1783.24 ; -549.36,-1724.83 -533.43,-1724.83 ; -549.36,-1722.17 -530.78,-1722.17 ; -549.36,-1615.97 -528.12,-1615.97 ; -549.36,-1538.97 -541.4,-1538.97 ; -549.36,-1326.57 -525.47,-1326.57 ; -549.36,-1262.85 -528.12,-1262.85 ; -546.71,-2168.22 -528.12,-2168.22 ; -546.71,-1958.47 -496.26,-1958.47 ; -546.71,-1955.81 -496.26,-1955.81 ; -546.71,-1953.16 -496.26,-1953.16 ; -546.71,-1950.5 -496.26,-1950.5 ; -546.71,-1931.92 -496.26,-1931.92 ; -546.71,-1929.26 -496.26,-1929.26 ; -546.71,-1926.61 -496.26,-1926.61 ; -546.71,-1923.95 -496.26,-1923.95 ; -546.71,-1788.55 -538.74,-1788.55 ; -546.71,-1719.52 -528.12,-1719.52 ; -546.71,-1618.62 -525.47,-1618.62 ; -546.71,-1536.32 -541.4,-1536.32 ; -546.71,-1454.01 -496.26,-1454.01 ; -544.05,-2218.66 -504.23,-2218.66 ; -544.05,-2165.56 -528.12,-2165.56 ; -544.05,-2093.87 -501.57,-2093.87 ; -544.05,-2067.32 -496.26,-2067.32 ; -544.05,-1947.85 -496.26,-1947.85 ; -544.05,-1945.19 -496.26,-1945.19 ; -544.05,-1942.54 -496.26,-1942.54 ; -544.05,-1939.88 -496.26,-1939.88 ; -544.05,-1937.23 -496.26,-1937.23 ; -544.05,-1934.57 -496.26,-1934.57 ; -544.05,-1791.2 -536.09,-1791.2 ; -544.05,-1716.86 -525.47,-1716.86 ; -544.05,-1621.28 -520.16,-1621.28 ; -544.05,-1533.66 -538.74,-1533.66 ; -544.05,-1323.92 -522.81,-1323.92 ; -544.05,-1265.51 -525.47,-1265.51 ; -544.05,-1241.61 -416.61,-1241.61 ; -541.4,-2162.91 -525.47,-2162.91 ; -541.4,-2099.18 -496.26,-2099.18 ; -541.4,-2096.53 -498.92,-2096.53 ; -541.4,-1793.86 -536.09,-1793.86 ; -541.4,-1714.21 -522.81,-1714.21 ; -541.4,-1623.93 -509.54,-1623.93 ; -541.4,-1584.11 -496.26,-1584.11 ; -541.4,-1581.45 -496.26,-1581.45 ; -541.4,-1578.8 -496.26,-1578.8 ; -541.4,-1576.14 -496.26,-1576.14 ; -541.4,-1573.49 -496.26,-1573.49 ; -541.4,-1570.83 -496.26,-1570.83 ; -541.4,-1568.18 -496.26,-1568.18 ; -541.4,-1565.52 -496.26,-1565.52 ; -541.4,-1562.87 -496.26,-1562.87 ; -541.4,-1560.21 -496.26,-1560.21 ; -541.4,-1557.56 -496.26,-1557.56 ; -541.4,-1451.36 -496.26,-1451.36 ; -541.4,-1268.16 -522.81,-1268.16 ; -538.74,-2160.25 -525.47,-2160.25 ; -538.74,-2157.6 -522.81,-2157.6 ; -538.74,-2101.84 -493.61,-2101.84 ; -538.74,-2069.98 -496.26,-2069.98 ; -538.74,-1796.51 -533.43,-1796.51 ; -538.74,-1711.55 -517.5,-1711.55 ; -538.74,-1589.42 -496.26,-1589.42 ; -538.74,-1586.76 -496.26,-1586.76 ; -538.74,-1554.9 -496.26,-1554.9 ; -538.74,-1552.25 -496.26,-1552.25 ; -538.74,-1549.59 -496.26,-1549.59 ; -538.74,-1531.01 -536.09,-1531.01 ; -538.74,-1507.11 -514.85,-1507.11 ; -538.74,-1321.26 -520.16,-1321.26 ; -538.74,-1270.82 -520.16,-1270.82 ; -536.09,-2221.32 -496.26,-2221.32 ; -536.09,-2154.94 -522.81,-2154.94 ; -536.09,-2152.28 -520.16,-2152.28 ; -536.09,-2107.15 -514.85,-2107.15 ; -536.09,-2104.49 -512.19,-2104.49 ; -536.09,-2072.63 -496.26,-2072.63 ; -536.09,-1799.17 -530.78,-1799.17 ; -536.09,-1772.62 -496.26,-1772.62 ; -536.09,-1769.96 -496.26,-1769.96 ; -536.09,-1767.31 -496.26,-1767.31 ; -536.09,-1764.65 -496.26,-1764.65 ; -536.09,-1762 -496.26,-1762 ; -536.09,-1759.34 -496.26,-1759.34 ; -536.09,-1756.69 -496.26,-1756.69 ; -536.09,-1754.03 -496.26,-1754.03 ; -536.09,-1751.38 -496.26,-1751.38 ; -536.09,-1748.72 -496.26,-1748.72 ; -536.09,-1746.07 -496.26,-1746.07 ; -536.09,-1708.9 -512.19,-1708.9 ; -536.09,-1626.59 -459.09,-1626.59 ; -536.09,-1594.73 -496.26,-1594.73 ; -536.09,-1592.07 -496.26,-1592.07 ; -536.09,-1546.94 -496.26,-1546.94 ; -536.09,-1544.28 -496.26,-1544.28 ; -536.09,-1448.7 -496.26,-1448.7 ; -536.09,-1318.61 -520.16,-1318.61 ; -536.09,-1273.47 -520.16,-1273.47 ; -536.09,-1244.27 -416.61,-1244.27 ; -533.43,-2149.63 -520.16,-2149.63 ; -533.43,-2146.97 -520.16,-2146.97 ; -533.43,-2115.11 -517.5,-2115.11 ; -533.43,-2112.46 -517.5,-2112.46 ; -533.43,-2109.8 -517.5,-2109.8 ; -533.43,-2075.29 -496.26,-2075.29 ; -533.43,-1780.58 -496.26,-1780.58 ; -533.43,-1777.93 -496.26,-1777.93 ; -533.43,-1775.27 -496.26,-1775.27 ; -533.43,-1743.41 -496.26,-1743.41 ; -533.43,-1740.76 -496.26,-1740.76 ; -533.43,-1706.24 -504.23,-1706.24 ; -533.43,-1629.24 -464.4,-1629.24 ; -533.43,-1600.04 -496.26,-1600.04 ; -533.43,-1597.38 -496.26,-1597.38 ; -533.43,-1541.63 -496.26,-1541.63 ; -533.43,-1446.05 -496.26,-1446.05 ; -533.43,-1315.95 -517.5,-1315.95 ; -533.43,-1276.13 -517.5,-1276.13 ; -533.43,-1246.92 -427.23,-1246.92 ; -530.78,-2144.32 -517.5,-2144.32 ; -530.78,-2141.66 -517.5,-2141.66 ; -530.78,-2139.01 -517.5,-2139.01 ; -530.78,-2136.35 -517.5,-2136.35 ; -530.78,-2133.7 -517.5,-2133.7 ; -530.78,-2131.04 -517.5,-2131.04 ; -530.78,-2128.39 -517.5,-2128.39 ; -530.78,-2125.73 -517.5,-2125.73 ; -530.78,-2123.08 -517.5,-2123.08 ; -530.78,-2120.42 -517.5,-2120.42 ; -530.78,-2117.77 -517.5,-2117.77 ; -530.78,-1785.89 -496.26,-1785.89 ; -530.78,-1783.24 -496.26,-1783.24 ; -530.78,-1738.1 -496.26,-1738.1 ; -530.78,-1735.45 -496.26,-1735.45 ; -530.78,-1703.59 -453.78,-1703.59 ; -530.78,-1602.69 -496.26,-1602.69 ; -530.78,-1538.97 -496.26,-1538.97 ; -530.78,-1536.32 -496.26,-1536.32 ; -530.78,-1443.39 -496.26,-1443.39 ; -530.78,-1440.74 -496.26,-1440.74 ; -530.78,-1313.3 -517.5,-1313.3 ; -530.78,-1310.64 -514.85,-1310.64 ; -530.78,-1281.44 -514.85,-1281.44 ; -530.78,-1278.78 -517.5,-1278.78 ; -528.12,-2223.97 -485.64,-2223.97 ; -528.12,-2080.6 -496.26,-2080.6 ; -528.12,-2077.94 -496.26,-2077.94 ; -528.12,-1788.55 -496.26,-1788.55 ; -528.12,-1732.79 -496.26,-1732.79 ; -528.12,-1631.9 -469.71,-1631.9 ; -528.12,-1605.35 -496.26,-1605.35 ; -528.12,-1533.66 -496.26,-1533.66 ; -528.12,-1517.73 -496.26,-1517.73 ; -528.12,-1438.08 -496.26,-1438.08 ; -528.12,-1435.43 -496.26,-1435.43 ; -528.12,-1307.99 -514.85,-1307.99 ; -528.12,-1305.33 -514.85,-1305.33 ; -528.12,-1302.68 -512.19,-1302.68 ; -528.12,-1300.02 -509.54,-1300.02 ; -528.12,-1289.4 -490.95,-1289.4 ; -528.12,-1286.75 -490.95,-1286.75 ; -528.12,-1284.09 -514.85,-1284.09 ; -528.12,-1249.58 -432.54,-1249.58 ; -525.47,-1793.86 -496.26,-1793.86 ; -525.47,-1791.2 -496.26,-1791.2 ; -525.47,-1730.14 -496.26,-1730.14 ; -525.47,-1700.93 -459.09,-1700.93 ; -525.47,-1608 -496.26,-1608 ; -525.47,-1531.01 -496.26,-1531.01 ; -525.47,-1432.77 -496.26,-1432.77 ; -525.47,-1430.12 -496.26,-1430.12 ; -525.47,-1427.46 -496.26,-1427.46 ; -525.47,-1424.81 -496.26,-1424.81 ; -525.47,-1297.37 -504.23,-1297.37 ; -525.47,-1294.71 -498.92,-1294.71 ; -525.47,-1292.06 -493.61,-1292.06 ; -525.47,-1252.23 -437.85,-1252.23 ; -522.81,-2226.63 -477.68,-2226.63 ; -522.81,-1796.51 -496.26,-1796.51 ; -522.81,-1727.48 -496.26,-1727.48 ; -522.81,-1528.35 -496.26,-1528.35 ; -522.81,-1525.7 -496.26,-1525.7 ; -522.81,-1523.04 -496.26,-1523.04 ; -522.81,-1520.39 -496.26,-1520.39 ; -522.81,-1422.15 -496.26,-1422.15 ; -522.81,-1419.5 -496.26,-1419.5 ; -522.81,-1416.84 -496.26,-1416.84 ; -522.81,-1414.19 -496.26,-1414.19 ; -522.81,-1254.89 -501.57,-1254.89 ; -520.16,-1812.44 -496.26,-1812.44 ; -520.16,-1799.17 -496.26,-1799.17 ; -520.16,-1724.83 -496.26,-1724.83 ; -520.16,-1698.28 -464.4,-1698.28 ; -520.16,-1634.55 -475.02,-1634.55 ; -520.16,-1610.66 -496.26,-1610.66 ; -520.16,-1411.53 -496.26,-1411.53 ; -520.16,-1408.88 -496.26,-1408.88 ; -520.16,-1406.22 -496.26,-1406.22 ; -520.16,-1403.57 -496.26,-1403.57 ; -520.16,-1400.91 -496.26,-1400.91 ; -520.16,-1398.26 -496.26,-1398.26 ; -520.16,-1257.54 -504.23,-1257.54 ; -517.5,-2229.28 -464.4,-2229.28 ; -517.5,-2091.22 -509.54,-2091.22 ; -517.5,-1807.13 -496.26,-1807.13 ; -517.5,-1804.48 -496.26,-1804.48 ; -517.5,-1801.82 -496.26,-1801.82 ; -517.5,-1722.17 -496.26,-1722.17 ; -517.5,-1395.6 -496.26,-1395.6 ; -517.5,-1392.95 -496.26,-1392.95 ; -517.5,-1260.2 -504.23,-1260.2 ; -514.85,-2231.94 -411.3,-2231.94 ; -514.85,-1809.79 -496.26,-1809.79 ; -514.85,-1719.52 -496.26,-1719.52 ; -514.85,-1613.31 -496.26,-1613.31 ; -514.85,-1390.29 -496.26,-1390.29 ; -514.85,-1262.85 -504.23,-1262.85 ; -512.19,-2234.59 -501.57,-2234.59 ; -512.19,-1695.62 -472.37,-1695.62 ; -512.19,-1637.21 -485.64,-1637.21 ; -512.19,-1480.56 -496.26,-1480.56 ; -512.19,-1387.64 -496.26,-1387.64 ; -512.19,-1268.16 -501.57,-1268.16 ; -512.19,-1265.51 -501.57,-1265.51 ; -509.54,-2237.25 -501.57,-2237.25 ; -509.54,-2117.77 -501.57,-2117.77 ; -509.54,-2115.11 -501.57,-2115.11 ; -509.54,-1273.47 -498.92,-1273.47 ; -509.54,-1270.82 -498.92,-1270.82 ; -506.88,-2277.07 -307.76,-2277.07 ; -506.88,-2239.9 -498.92,-2239.9 ; -506.88,-2125.73 -496.26,-2125.73 ; -506.88,-2123.08 -498.92,-2123.08 ; -506.88,-2120.42 -498.92,-2120.42 ; -506.88,-2112.46 -504.23,-2112.46 ; -506.88,-1716.86 -496.26,-1716.86 ; -504.23,-2242.56 -498.92,-2242.56 ; -504.23,-2083.25 -496.26,-2083.25 ; -504.23,-1692.97 -482.99,-1692.97 ; -501.57,-2247.87 -496.26,-2247.87 ; -501.57,-2245.21 -498.92,-2245.21 ; -501.57,-1615.97 -496.26,-1615.97 ; -498.92,-2250.52 -496.26,-2250.52 ; -498.92,-2234.59 -416.61,-2234.59 ; -498.92,-2104.49 -493.61,-2104.49 ; -496.26,-2274.42 -307.76,-2274.42 ; -496.26,-2107.15 -493.61,-2107.15 ; -496.26,-1284.09 -488.3,-1284.09 ; -496.26,-1254.89 -443.16,-1254.89 ; -493.61,-2271.76 -307.76,-2271.76 ; -493.61,-2112.46 -490.95,-2112.46 ; -493.61,-2109.8 -490.95,-2109.8 ; -493.61,-1281.44 -488.3,-1281.44 ; -490.95,-2269.11 -307.76,-2269.11 ; -490.95,-1278.78 -488.3,-1278.78 ; -490.95,-1276.13 -488.3,-1276.13 ; -490.95,-1257.54 -445.82,-1257.54 ; -488.3,-2266.45 -307.76,-2266.45 ; -488.3,-2263.8 -307.76,-2263.8 ; -488.3,-2261.14 -307.76,-2261.14 ; -488.3,-2258.49 -307.76,-2258.49 ; -488.3,-2250.52 -472.37,-2250.52 ; -488.3,-2247.87 -482.99,-2247.87 ; -488.3,-2237.25 -421.92,-2237.25 ; -488.3,-1623.93 -456.44,-1623.93 ; -488.3,-1260.2 -448.47,-1260.2 ; -485.64,-2255.83 -307.76,-2255.83 ; -485.64,-2253.18 -307.76,-2253.18 ; -485.64,-1706.24 -451.13,-1706.24 ; -485.64,-1480.56 -480.33,-1480.56 ; -485.64,-1262.85 -451.13,-1262.85 ; -482.99,-1483.22 -437.85,-1483.22 ; -482.99,-1342.5 -477.68,-1342.5 ; -482.99,-1268.16 -456.44,-1268.16 ; -482.99,-1265.51 -453.78,-1265.51 ; -480.33,-1485.87 -437.85,-1485.87 ; -480.33,-1345.16 -472.37,-1345.16 ; -480.33,-1273.47 -461.75,-1273.47 ; -480.33,-1270.82 -459.09,-1270.82 ; -477.68,-2239.9 -427.23,-2239.9 ; -477.68,-1849.61 -472.37,-1849.61 ; -477.68,-1621.28 -453.78,-1621.28 ; -477.68,-1347.81 -469.71,-1347.81 ; -477.68,-1284.09 -467.06,-1284.09 ; -477.68,-1281.44 -464.4,-1281.44 ; -477.68,-1278.78 -464.4,-1278.78 ; -477.68,-1276.13 -461.75,-1276.13 ; -475.02,-2178.84 -472.37,-2178.84 ; -475.02,-2176.18 -469.71,-2176.18 ; -475.02,-2173.53 -467.06,-2173.53 ; -475.02,-2170.87 -464.4,-2170.87 ; -475.02,-1987.67 -472.37,-1987.67 ; -475.02,-1846.96 -432.54,-1846.96 ; -475.02,-1488.53 -437.85,-1488.53 ; -475.02,-1350.47 -451.13,-1350.47 ; -472.37,-2168.22 -461.75,-2168.22 ; -472.37,-2165.56 -456.44,-2165.56 ; -472.37,-1985.02 -467.06,-1985.02 ; -472.37,-1844.3 -432.54,-1844.3 ; -472.37,-1708.9 -448.47,-1708.9 ; -472.37,-1618.62 -451.13,-1618.62 ; -472.37,-1576.14 -445.82,-1576.14 ; -472.37,-1355.78 -451.13,-1355.78 ; -472.37,-1353.12 -451.13,-1353.12 ; -469.71,-2162.91 -451.13,-2162.91 ; -469.71,-1982.36 -464.4,-1982.36 ; -469.71,-1979.71 -445.82,-1979.71 ; -469.71,-1841.65 -432.54,-1841.65 ; -469.71,-1358.43 -451.13,-1358.43 ; -467.06,-2160.25 -405.99,-2160.25 ; -467.06,-1977.05 -445.82,-1977.05 ; -467.06,-1754.03 -437.85,-1754.03 ; -467.06,-1711.55 -445.82,-1711.55 ; -467.06,-1615.97 -445.82,-1615.97 ; -467.06,-1491.18 -437.85,-1491.18 ; -467.06,-1480.56 -437.85,-1480.56 ; -467.06,-1363.74 -451.13,-1363.74 ; -467.06,-1361.09 -451.13,-1361.09 ; -464.4,-2242.56 -437.85,-2242.56 ; -464.4,-2157.6 -408.65,-2157.6 ; -464.4,-1974.4 -445.82,-1974.4 ; -464.4,-1971.74 -445.82,-1971.74 ; -464.4,-1849.61 -432.54,-1849.61 ; -464.4,-1613.31 -445.82,-1613.31 ; -464.4,-1578.8 -427.23,-1578.8 ; -464.4,-1379.67 -448.47,-1379.67 ; -464.4,-1377.02 -448.47,-1377.02 ; -464.4,-1374.36 -451.13,-1374.36 ; -464.4,-1371.71 -451.13,-1371.71 ; -464.4,-1369.05 -451.13,-1369.05 ; -464.4,-1366.4 -451.13,-1366.4 ; -464.4,-1347.81 -451.13,-1347.81 ; -464.4,-1345.16 -451.13,-1345.16 ; -464.4,-1342.5 -451.13,-1342.5 ; -464.4,-1339.85 -451.13,-1339.85 ; -464.4,-1337.19 -451.13,-1337.19 ; -464.4,-1334.54 -451.13,-1334.54 ; -464.4,-1331.88 -451.13,-1331.88 ; -464.4,-1329.23 -451.13,-1329.23 ; -464.4,-1326.57 -451.13,-1326.57 ; -464.4,-1323.92 -451.13,-1323.92 ; -464.4,-1321.26 -451.13,-1321.26 ; -464.4,-1318.61 -451.13,-1318.61 ; -464.4,-1315.95 -451.13,-1315.95 ; -464.4,-1313.3 -451.13,-1313.3 ; -464.4,-1310.64 -451.13,-1310.64 ; -464.4,-1307.99 -451.13,-1307.99 ; -464.4,-1305.33 -451.13,-1305.33 ; -461.75,-2154.94 -413.96,-2154.94 ; -461.75,-1969.09 -445.82,-1969.09 ; -461.75,-1966.43 -445.82,-1966.43 ; -461.75,-1714.21 -443.16,-1714.21 ; -461.75,-1610.66 -443.16,-1610.66 ; -461.75,-1477.91 -437.85,-1477.91 ; -461.75,-1406.22 -448.47,-1406.22 ; -461.75,-1403.57 -448.47,-1403.57 ; -461.75,-1400.91 -448.47,-1400.91 ; -461.75,-1398.26 -448.47,-1398.26 ; -461.75,-1395.6 -448.47,-1395.6 ; -461.75,-1392.95 -448.47,-1392.95 ; -461.75,-1390.29 -448.47,-1390.29 ; -461.75,-1387.64 -448.47,-1387.64 ; -461.75,-1384.98 -448.47,-1384.98 ; -461.75,-1382.33 -448.47,-1382.33 ; -461.75,-1302.68 -448.47,-1302.68 ; -461.75,-1300.02 -448.47,-1300.02 ; -461.75,-1297.37 -448.47,-1297.37 ; -461.75,-1294.71 -445.82,-1294.71 ; -459.09,-2024.84 -443.16,-2024.84 ; -459.09,-2022.19 -445.82,-2022.19 ; -459.09,-2019.53 -445.82,-2019.53 ; -459.09,-2016.88 -445.82,-2016.88 ; -459.09,-2014.22 -445.82,-2014.22 ; -459.09,-2011.57 -445.82,-2011.57 ; -459.09,-2008.91 -445.82,-2008.91 ; -459.09,-2006.26 -445.82,-2006.26 ; -459.09,-2003.6 -445.82,-2003.6 ; -459.09,-2000.95 -445.82,-2000.95 ; -459.09,-1998.29 -445.82,-1998.29 ; -459.09,-1995.64 -445.82,-1995.64 ; -459.09,-1992.98 -445.82,-1992.98 ; -459.09,-1990.33 -445.82,-1990.33 ; -459.09,-1987.67 -445.82,-1987.67 ; -459.09,-1985.02 -445.82,-1985.02 ; -459.09,-1982.36 -445.82,-1982.36 ; -459.09,-1963.78 -445.82,-1963.78 ; -459.09,-1961.12 -445.82,-1961.12 ; -459.09,-1958.47 -443.16,-1958.47 ; -459.09,-1955.81 -443.16,-1955.81 ; -459.09,-1838.99 -429.89,-1838.99 ; -459.09,-1756.69 -448.47,-1756.69 ; -459.09,-1716.86 -440.51,-1716.86 ; -459.09,-1581.45 -427.23,-1581.45 ; -459.09,-1432.77 -432.54,-1432.77 ; -459.09,-1430.12 -432.54,-1430.12 ; -459.09,-1427.46 -429.89,-1427.46 ; -459.09,-1424.81 -429.89,-1424.81 ; -459.09,-1422.15 -427.23,-1422.15 ; -459.09,-1419.5 -445.82,-1419.5 ; -459.09,-1416.84 -445.82,-1416.84 ; -459.09,-1414.19 -445.82,-1414.19 ; -459.09,-1411.53 -445.82,-1411.53 ; -459.09,-1408.88 -448.47,-1408.88 ; -459.09,-1292.06 -445.82,-1292.06 ; -459.09,-1289.4 -443.16,-1289.4 ; -456.44,-2152.28 -419.27,-2152.28 ; -456.44,-2035.46 -440.51,-2035.46 ; -456.44,-2032.81 -443.16,-2032.81 ; -456.44,-2030.15 -443.16,-2030.15 ; -456.44,-2027.5 -443.16,-2027.5 ; -456.44,-1953.16 -443.16,-1953.16 ; -456.44,-1950.5 -443.16,-1950.5 ; -456.44,-1947.85 -443.16,-1947.85 ; -456.44,-1945.19 -443.16,-1945.19 ; -456.44,-1942.54 -443.16,-1942.54 ; -456.44,-1939.88 -443.16,-1939.88 ; -456.44,-1937.23 -443.16,-1937.23 ; -456.44,-1934.57 -443.16,-1934.57 ; -456.44,-1931.92 -443.16,-1931.92 ; -456.44,-1929.26 -443.16,-1929.26 ; -456.44,-1852.27 -432.54,-1852.27 ; -456.44,-1751.38 -421.92,-1751.38 ; -456.44,-1719.52 -437.85,-1719.52 ; -456.44,-1608 -440.51,-1608